# EAGLE board MagusConnectors (EAGLE 9.1.3)
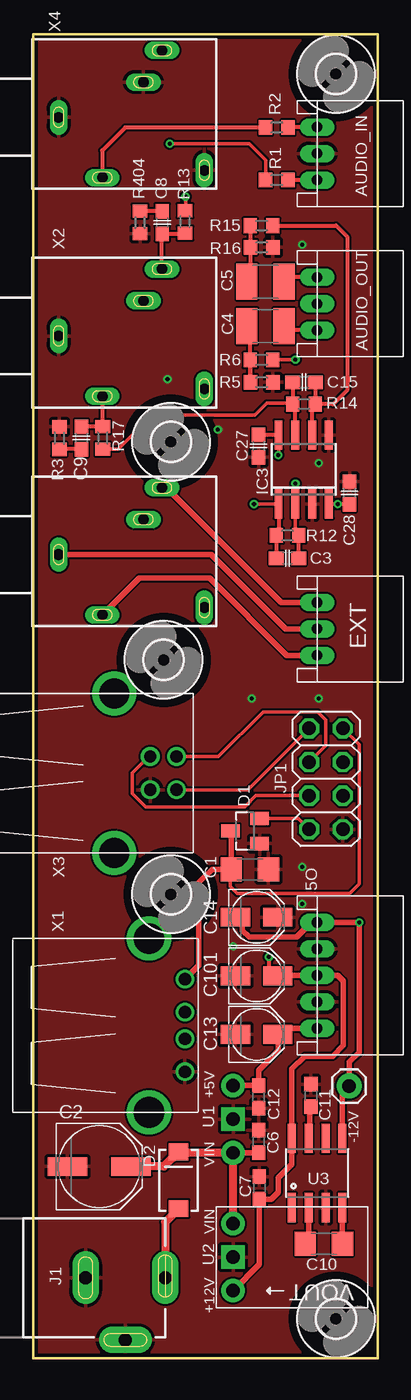
[diagram p0: board, top side]
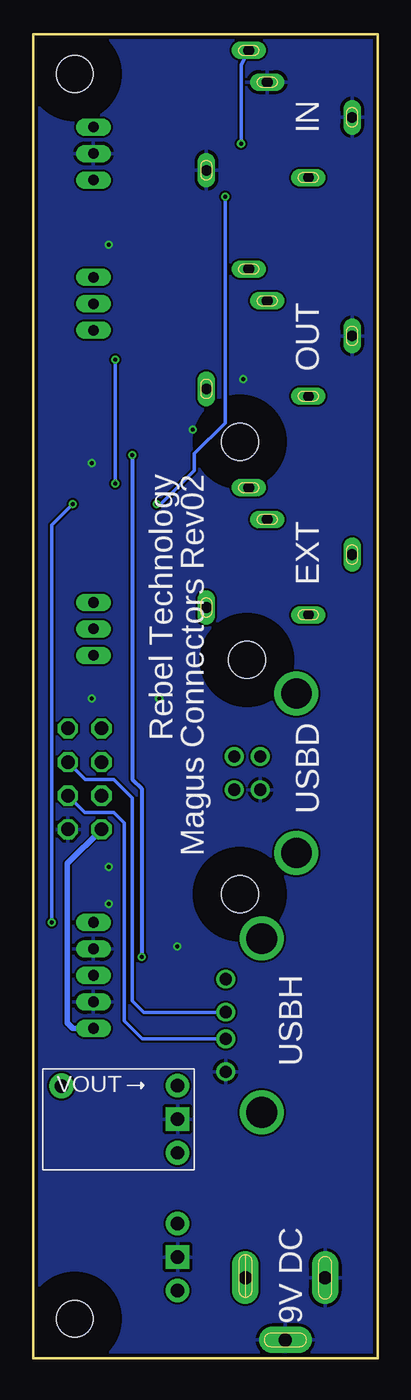
[diagram p1: board, bottom side, seen from below]

Size 26 x 100 mm. Coordinates in mm from the lower left corner, seen from the top.
Outline: 26,100 26,0 0,0 0,100 26,100
Copper layers (1*16): Top 0.035mm / dielectric 1.5mm / Bottom 0.035mm
Design rules "SeeedStudio_2layer_DRU_no_angle_20140221": minimum track width 6mil, minimum drill 12mil, track to track 6mil, track to pad 6mil, pad to pad 6mil, via to via 6mil, smd to smd 0mil, copper to edge 10mil, drill to drill 10mil, minimum pad ring 10mil, minimum via ring 6mil, stop-mask expansion 2mil, vias tented up to drill 100mil, thermal gap 10mil
Net classes: 1 power: width 0.178 mm, drill 0.305 mm, clearance 0.178 mm to class 0, clearance 0.178 mm

## Footprints (pad centres in the part's own frame; a part is rotated, then mirrored left to right if it is on the bottom)
CON-JST_PH_5W = drill 0.8 long: P1 0,0; P2 -2,0; P3 -4,0; P4 -6,0; P5 -8,0
1X01 = drill 1.016 pad 1.88: 1 0,0
CON-JST_PH_3W = drill 0.8 long: P1 0,0; P2 -2,0; P3 -4,0
C1206 = smd 1.6 x 1.8: 1 -1.4,0; 2 1.4,0
PANASONIC_D = smd 3 x 1.4: + 2.4,0; - -2.4,0
C0603 = smd 1.1 x 1: 1 -0.85,0; 2 0.85,0
C1210 = smd 1.6 x 2.7: 1 -1.4,0; 2 1.4,0
PANASONIC_B = smd 2.2 x 1.4: + 1.6,0; - -1.6,0
SOT23 = smd 1 x 1.4: 1 -0.95,-1.1; 2 0.95,-1.1; 3 0,1.1
SMA-DIODE = smd 1.27 x 1.47: A -2.15,0; C 2.15,0
SO08 = smd 0.6 x 2.2: 1 -1.905,-2.6; 2 -0.635,-2.6; 3 0.635,-2.6; 4 1.905,-2.6; 5 1.905,2.6; 6 0.635,2.6; 7 -0.635,2.6; 8 -1.905,2.6
DC_JACK_SLOT = drill 1 pad 2 long: GND 0,4.743; GNDBREAK 4.697,7.742; PWR 0,10.749
2X04 = drill 1.016 octagon: 1 -3.81,-1.27; 2 -3.81,1.27; 3 -1.27,-1.27; 4 -1.27,1.27; 5 1.27,-1.27; 6 1.27,1.27; 7 3.81,-1.27; 8 3.81,1.27
R0603 = smd 1 x 1.1: 1 -0.85,0; 2 0.85,0
REG_S9V11F5 = drill 1.016 pad 1.778 square: GND 0,0 | drill 1.016 pad 1.778: VIN -2.54,0; VOUT 2.54,0
SOIC8 = smd 0.61 x 2.21: 1 -1.905,-2.616; 2 -0.635,-2.616; 3 0.635,-2.616; 4 1.905,-2.616; 5 1.905,2.616; 6 0.635,2.616; 7 -0.635,2.616; 8 -1.905,2.616
2,8 = hole 2.8: 0,0
USB-A-H = drill 0.914: D+ 2.718,-1.003; D- 2.718,1.003; GND 2.718,-3.493; VBUS 2.718,3.493 | drill 2.311: P$5 0,-6.566; P$6 0,6.566
1503_09 = drill 0.8 pad 1.2 long: 1 0,-2.1; 2 -4.55,-5.4; 3 5.05,-9.9; 4 -4,-13.1; 5 2.65,-8.5
USB-B-H = drill 0.914: D+ 0,1.25; D- 1.981,1.25; GND 0,-1.25; VBUS 1.981,-1.25 | drill 2.286: P$1 -2.718,-6.02; P$2 -2.718,6.02

## Placement (x,y rotation side)
5O  CON-JST_PH_5W  [CON-JST_PH_5W]  21.45,24.93 270 top
-12V  M01PTH  [1X01]  23.86,20.58 0 top
AUDIO_IN  CON-JST_PH_3W  [CON-JST_PH_3W]  21.45,89 270 top
AUDIO_OUT  CON-JST_PH_3W  [CON-JST_PH_3W]  21.45,77.65 270 top
C1  10u  [C1206]  16.37,36.93 0 top
C2  2200u 10v  [PANASONIC_D]  4.99,14.49 0 top
C3  750p  [C0603]  19.21,60.42 0 top
C4  1u Polyester  [C1210]  17.54,77.95 180 top
C5  1u Polyester  [C1210]  17.54,81.32 180 top
C6  100n  [C0603]  17.03,16.39 270 top
C7  100n  [C0603]  17.07,12.88 270 top
C8  47n  [C0603]  9.75,85.79 90 top
C9  47n  [C0603]  3.65,69.51 270 top
C10  10u  [C1206]  21.95,8.67 180 top
C11  NP  [C0603]  20.98,19.86 270 top
C12  100n  [C0603]  17.03,19.75 90 top
C13  100u 6.3v  [PANASONIC_B]  16.87,24.47 0 top
C14  47u 16v  [PANASONIC_B]  16.87,33.31 0 top
C15  750p  [C0603]  20.45,73.72 0 top
C27  100n  [C0603]  17.02,68.92 270 top
C28  100n  [C0603]  23.89,65.36 90 top
C101  47u 16v  [PANASONIC_B]  16.87,28.89 0 top
D1  BAT54S  [SOT23]  16,39.83 90 top
D2  S1J  [SMA-DIODE]  10.99,13.47 90 top
EXT  CON-JST_PH_3W  [CON-JST_PH_3W]  21.45,53.09 270 top
IC3  RC4560  [SO08]  20.43,67.14 0 top
J1  POWER_JACK  [DC_JACK_SLOT]  -0.78,6.1 270 top
JP1  [2X04]  22.11,43.77 270 top
R1  22k  [R0603]  18.4,89 180 top
R2  22k  [R0603]  18.4,92.96 180 top
R3  10R  [R0603]  1.98,69.51 270 top
R5  100k  [R0603]  17.25,73.71 180 top
R6  22k  [R0603]  17.25,75.4 180 top
R12  10k  [R0603]  19.21,62.16 0 top
R13  22R  [R0603]  11.46,85.83 90 top
R14  10k  [R0603]  20.45,72.07 0 top
R15  22k  [R0603]  17.25,85.55 180 top
R16  100k  [R0603]  17.25,83.92 180 top
R17  22R  [R0603]  5.26,69.52 270 top
R404  10R  [R0603]  8.07,85.79 90 top
U1  S9V11F5  [REG_S9V11F5]  15.1,18.07 90 bottom
U2  S10V2F12  [REG_S9V11F5]  15.1,7.66 270 top
U3  ICL7660A  [SOIC8]  21.45,14.01 0 top
U$1  [2,8]  22.86,3 90 top
U$2  [2,8]  10.4,69.22 90 top
U$3  [2,8]  10.4,35.06 90 top
U$4  [2,8]  9.86,52.75 90 top
U$5  [2,8]  22.86,97 90 top
X1  [USB-A-H]  8.75,25.15 0 top
X2  1503_09  [1503_09]  -0.17,77.22 90 top
X3  [USB-B-H]  8.85,44.2 0 top
X4  1503_09  [1503_09]  -0.17,93.73 90 top
X5  1503_09  [1503_09]  -0.17,60.71 90 top

## Library data of the parts
5O AUDIO_IN AUDIO_OUT C1-C5 C8 C9 C13-C15 C27 C28 C101 EXT J1 U1-U3 = Rebel
-12V D2 = SparkFun
C6 C7 C10-C12 = rcl
D1 = diode
IC3 = linear
JP1 = pinhead
R1-R3 R5 R6 R12-R17 R404 = resistor
U$1-U$5 = holes
X1 X3 = con-usb-3
X2 X4 X5 = con-lumberg; OC_FARNELL: 1243244; OC_NEWARK: unknown

## Nets
+5V: 5O.P1 C12.2 C13.+ D1.2 JP1.7 U1.VOUT
+9V: C2.+ C6.2 D2.C U1.VIN U2.VIN
+12V: 5O.P3 C7.2 C27.1 C101.+ IC3.8 U2.VOUT U3.8
-12V: 5O.P5 -12V.1 C14.- C28.1 IC3.4 U3.5
EXT_USB_D_D+: JP1.5 X3.D+
EXT_USB_D_D-: JP1.3 X3.D-
EXT_USB_D_VBUS: JP1.1 X3.VBUS
EXT_USB_H_D+: JP1.6 X1.D+
EXT_USB_H_D-: JP1.4 X1.D-
EXT_USB_H_VBUS: C1.1 D1.3 JP1.2 X1.VBUS
GND: 5O.P2 5O.P4 AUDIO_IN.P2 C1.2 C2.- C6.1 C7.1 C11.1 C12.1 C13.- C14.+ C27.2 C28.2 C101.- D1.1 IC3.3 IC3.5 J1.GND J1.GNDBREAK JP1.8 R3.1 R5.1 R16.1 R404.1 U1.GND U2.GND U3.3 X1.GND X2.1 X3.GND X4.1 X4.4 X4.5
IN_L: R1.2 X4.3
IN_R: R2.2 X4.2
L_OUT: C8.1 R13.1 X2.3
N$1: C15.2 IC3.6 R14.2 R15.1
N$2: C15.1 IC3.7 R14.1 R17.2
N$3: C3.2 IC3.2 R6.1 R12.2
N$4: C5.2 R15.2 R16.2
N$5: AUDIO_IN.P3 R2.1
N$6: AUDIO_IN.P1 R1.1
N$7: EXT.P1 X5.2
N$8: C4.2 R5.2 R6.2
N$9: D2.A J1.PWR
N$10: C10.1 U3.4
N$11: C10.2 U3.2
N$12: C9.2 R3.2
N$13: C11.2 U3.7
N$14: EXT.P3 X5.3
N$15: EXT.P2 X5.1
N$19: C3.1 IC3.1 R12.1 R13.2
N$21: C8.2 R404.2
OUT_L: AUDIO_OUT.P1 C4.1
OUT_R: AUDIO_OUT.P3 C5.1
R_OUT: C9.1 R17.1 X2.2

## Tracks (layer width: path | path; a pad name or v marks a point on that pad's centre or on a via)
+5V
  Top 0.254: JP1.7 20.02,40.78 D1.2
  Top 0.406: 5O.P1 18.73,24.93 C13.+ 18.5,24.44 18.5,23.23 17.02,21.74 C12.2 | U1.VOUT C12.2 | C12.2
  Bottom 0.406: JP1.7 23.41,37.39 23.41,25.33 23,24.93 5O.P1
+9V
  Top 0.406: U1.VIN C6.2
  Top 0.61: U2.VIN U1.VIN 11.07,15.53 D2.C 9.86,14.49 C2.+
+12V  (via drill 0.3)
  Top 0.254: IC3.8 18.52,68.24 v18.5,68.22
  Top 0.305: IC3.8 17.05,69.74 C27.1 | v17.8,30.33 17.8,29.56 C101.+
  Top 0.406: C101.+ 18.54,28.93 5O.P3 23,28.93 23.41,28.53 23.41,23.63 22.61,22.83 20.5,22.83 19.54,21.87 U3.8 19.54,14.67 18.5,13.63 18.5,12.55 17.99,12.03 C7.2 17.07,7.09 U2.VOUT
  Bottom 0.305: v18.5,68.22 18.5,43.73 17.8,43.03 v17.8,30.33
-12V  (via drill 0.3)
  Top 0.254: C28.1 v23,64.51 | IC3.4 22.36,64.51 v23,64.51 | v23,64.51 v23,64.52
  Top 0.406: C14.- 15.53,33.31 15.8,33.03 15.8,32.33 16.3,31.83 19.91,31.83 21,32.93 5O.P5 v24.61,32.93 24.61,23.13 23.86,22.39 -12V.1 23.35,20.07 U3.5
  Bottom 0.254: v23,64.52 24.61,62.92 v24.61,32.93
EXT_USB_D_D+
  Top 0.254: JP1.5 16.82,42.5 15.98,41.66 8.49,41.66 7.48,42.68 7.48,44.2 8.72,45.45 X3.D+
EXT_USB_D_D-
  Top 0.254: JP1.3 22.11,46.31 22.11,48.23 21.5,48.83 17.37,48.83 13.98,45.45 X3.D-
EXT_USB_D_VBUS
  Top 0.254: JP1.1 16.21,42.95 X3.VBUS
EXT_USB_H_D+
  Bottom 0.254: X1.D+ 17.75,24.15 19.11,25.5 19.11,40.43 19.91,41.23 22.11,41.23 JP1.6
EXT_USB_H_D-
  Bottom 0.254: X1.D- 17.66,26.15 18.5,27 18.5,42.33 19.91,43.73 22.07,43.73 JP1.4
EXT_USB_H_VBUS
  Top 0.254: D1.3 14.89,35.64 15.41,35.13 23.91,35.13 24.61,35.83 24.61,46.35 JP1.2
  Top 0.406: X1.VBUS 12.51,29.68 12.51,35.93 13.51,36.93 C1.1 14.96,39.76 D1.3
GND  (via drill 0.3)
  other vias: 20.3,34.33 20.3,37.13 15.11,31.13 21.57,49.83 16.5,49.83 21.57,67.61 13.96,70.15 10.14,73.96 20.3,84.12
  pour Top: 26.48,-7.06 -4.94,-7.06 -4.94,100.75 26.48,100.75
  pour Bottom: 26.75,-7.33 -4.94,-7.33 -4.94,101.75 26.75,101.75
IN_L  (via drill 0.3)
  Top 0.254: R1.2 17.55,90.48 16.3,91.72 v10.3,91.72
  Bottom 0.254: v10.3,91.72 10.3,97.69 X4.3
IN_R
  Top 0.305: R2.2 6.94,92.96 5.21,91.22 5.21,88.69 X4.2
L_OUT
  Top 0.305: X2.3 9.72,84.92 C8.1 11.42,84.94 R13.1
N$1
  Top 0.305: R15.1 22.88,85.55 23.71,84.72 23.71,73.12 22.65,72.07 R14.2 | R14.2 | IC3.6 21.06,71.84 R14.2 | C15.2 R14.2
N$2
  Top 0.254: R17.2 6.41,68.67 8.99,71.25 16.75,71.25 17.64,72.14 19.43,72.14 19.55,72.02 R14.1
  Top 0.305: IC3.7 19.79,71.87 R14.1 C15.1
N$3  (via drill 0.3)
  Top 0.254: R6.1 18.17,75.42 v19.8,75.42 | R12.2 arc-90 19.8,62.41 19.8,64.53 IC3.2 v19.8,66.07
  Top 0.305: 19.79,62.32 R12.2 C3.2
  Bottom 0.254: v19.8,75.42 v19.8,66.07
N$4
  Top 0.305: R15.2 R16.2 16.41,80.72 16.3,80.62 16.3,81.15 C5.2
N$5
  Top 0.305: AUDIO_IN.P3 19.28,93 R2.1
N$6
  Top 0.305: AUDIO_IN.P1 R1.1
N$7
  Top 0.406: X5.2 8,58.93 13.32,58.93 19.16,53.09 EXT.P1
N$8
  Top 0.305: R6.2 16.4,75.31 R5.2 16.41,77.68 C4.2
N$9
  Top 0.61: 11.24,11.06 D2.A 9.97,10.3 J1.PWR
N$10
  Top 0.406: U3.4 C10.1
N$11
  Top 0.406: U3.2 20.81,8.93 C10.2
N$12
  Top 0.305: C9.2 R3.2
N$13
  Top 0.406: U3.7 20.88,16.69 20.88,18.91 C11.2
N$14
  Top 0.406: EXT.P3 18.71,57.09 13.83,61.98 10.04,65.76 X5.3
N$15
  Top 0.406: EXT.P2 19.06,55.09 13.44,60.71 X5.1
N$19  (via drill 0.3)
  Top 0.254: R13.2 11.51,86.63 v11.51,87.72 v11.51,87.73 | v16.68,64.52 18.51,64.52 IC3.1
  Top 0.305: IC3.1 18.52,62.43 R12.1 C3.1
  Bottom 0.254: v11.51,87.73 11.51,70.65 13.83,68.33 13.83,67.06 16.37,64.52 v16.68,64.52
N$21
  Top 0.305: C8.2 R404.2
OUT_L
  Top 0.305: AUDIO_OUT.P1 19.23,77.65 C4.1
OUT_R
  Top 0.305: AUDIO_OUT.P3 19.27,81.65 C5.1
R_OUT
  Top 0.305: C9.1 3.75,70.37 R17.1 5.23,70.4 X2.2

## Text on the board
tPlace: +5V | VIN | VIN | +12V
bPlace: IN | OUT | Magus Connectors Rev02 | Rebel Technology | EXT | USBD | USBH | 9V DC